# EAGLE board phase and amplifier (EAGLE 9.1.2)
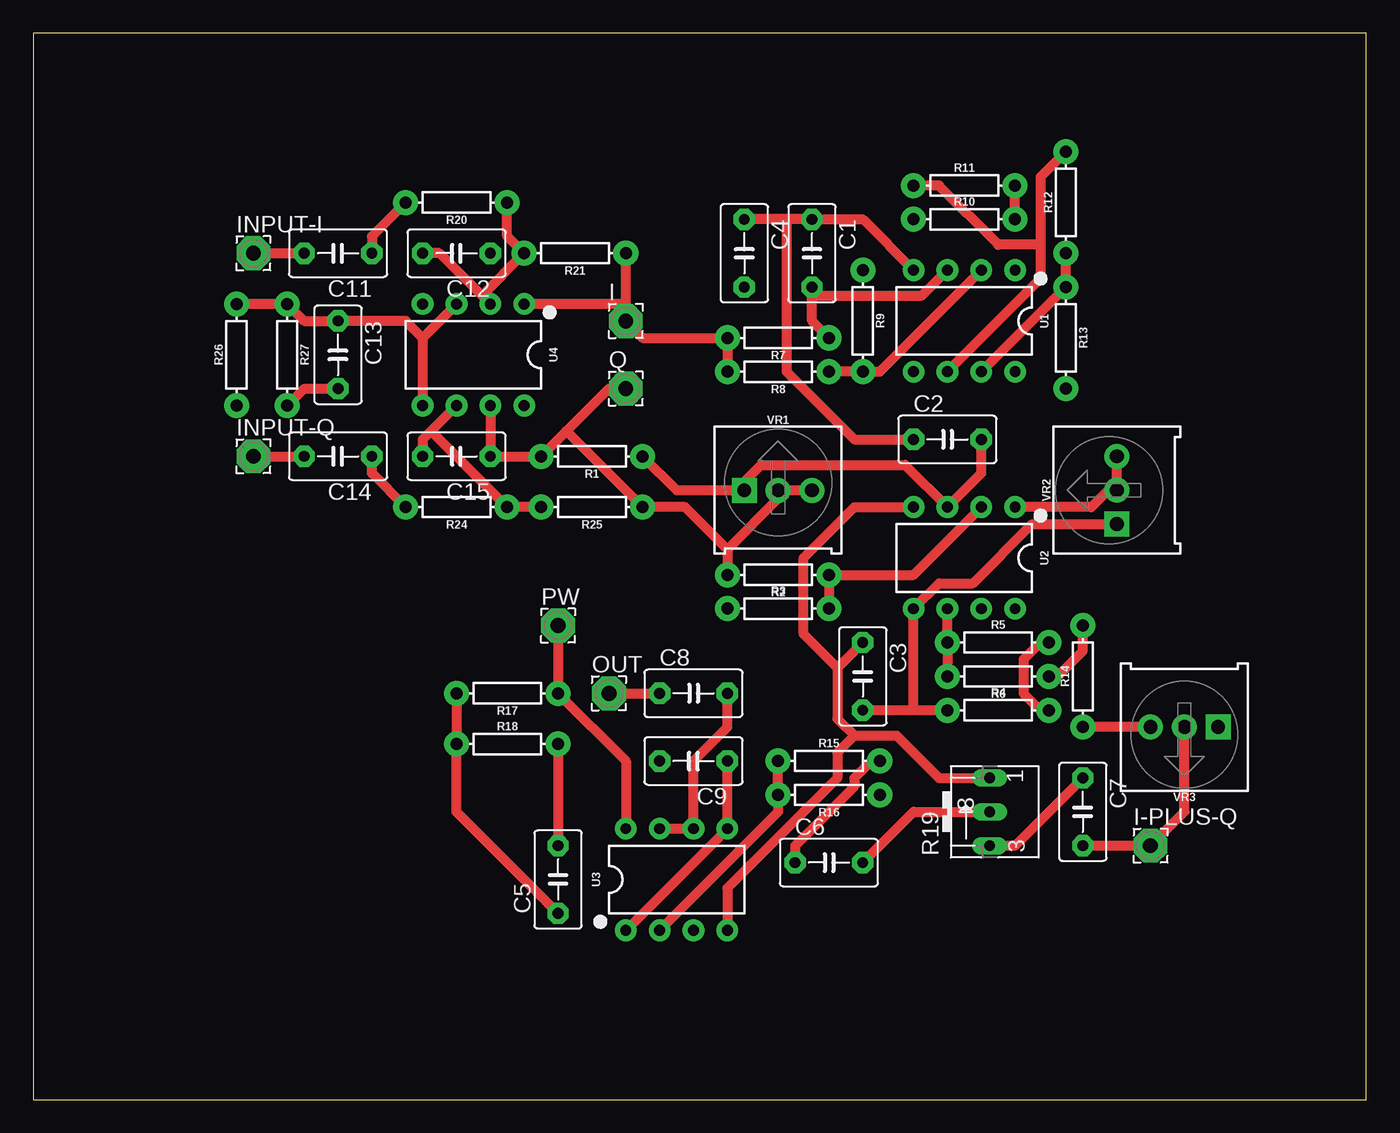
[diagram p0: board, top side]
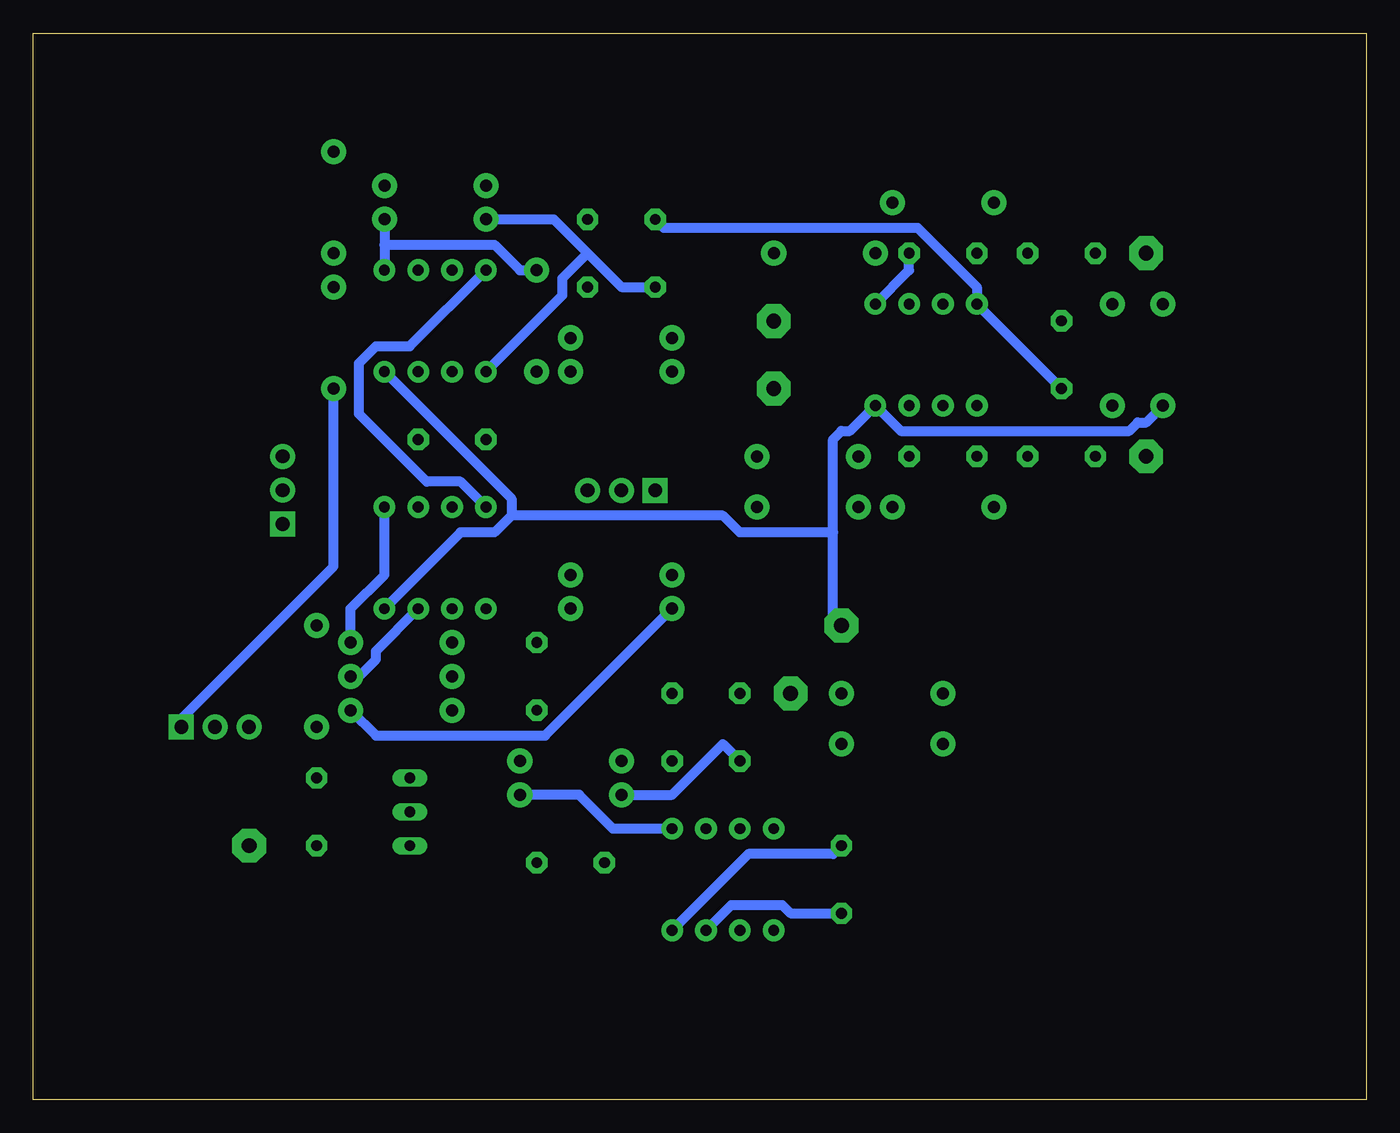
[diagram p1: board, bottom side, seen from below]

Size 100 x 80 mm. Coordinates in mm from the lower left corner, seen from the top.
Outline: 0,0 100,0 100,80 0,80 0,0
Copper layers (1*16): Top 0.035mm / dielectric 1.5mm / Bottom 0.035mm
Design rules "default": minimum track width 6mil, minimum drill 0.35mm, track to track 6mil, track to pad 6mil, pad to pad 6mil, via to via 6mil, smd to smd 6mil, copper to edge 40mil, drill to drill 6mil, minimum pad ring 10mil, minimum via ring 8mil, stop-mask expansion 4mil, vias tented up to drill 0mil, thermal gap 10mil
Net classes: 0 default: width 0.762 mm, drill 0.762 mm, clearance 0.508 mm

## Footprints (pad centres in the part's own frame; a part is rotated, then mirrored left to right if it is on the bottom)
C5B3.5 = drill 0.813 pad 1.6 octagon: 1 -2.54,0; 2 2.54,0
2,54/1,1 = drill 1.118 pad 2.54 octagon: 1 0,0
AXIAL-0.3 = drill 0.9 pad 1.88: P$1 -3.81,0; P$2 3.81,0
B25V = drill 0.813 long: A 2.54,0.635; E -2.54,0.635; S 0,0.635
DIP08 = drill 0.813 pad 1.626: 1 -3.81,-3.81; 2 -1.27,-3.81; 3 1.27,-3.81; 4 3.81,-3.81; 5 3.81,3.81; 6 1.27,3.81; 7 -1.27,3.81; 8 -3.81,3.81
TRIMPOT-PTH-3386U = drill 1.016 pad 1.88 square: 1 -2.54,-0.015 | drill 1.016 pad 1.88: 2 0,-0.015; 3 2.54,-0.015

## Placement (x,y rotation side)
C1  47nF  [C5B3.5]  58.42,63.5 270 top
C2  10nF  [C5B3.5]  68.58,49.53 0 top
C3  .1uF  [C5B3.5]  62.23,31.75 270 top
C4  470nF  [C5B3.5]  53.34,63.5 270 top
C5  10uF  [C5B3.5]  39.37,16.51 90 top
C6  1uF  [C5B3.5]  59.69,17.78 0 top
C7  1uF  [C5B3.5]  78.74,21.59 270 top
C8  10uF  [C5B3.5]  49.53,30.48 0 top
C9  1nF  [C5B3.5]  49.53,25.4 180 top
C11  1uF  [C5B3.5]  22.86,63.5 180 top
C12  1nF  [C5B3.5]  31.75,63.5 180 top
C13  10uF  [C5B3.5]  22.86,55.88 270 top
C14  1uF  [C5B3.5]  22.86,48.26 180 top
C15  1nF  [C5B3.5]  31.75,48.26 180 top
I  [2,54/1,1]  44.45,58.42 0 top
I-PLUS-Q  [2,54/1,1]  83.82,19.05 0 top
INPUT-I  [2,54/1,1]  16.51,63.5 0 top
INPUT-Q  [2,54/1,1]  16.51,48.26 0 top
OUT  [2,54/1,1]  43.18,30.48 0 top
PW  [2,54/1,1]  39.37,35.56 0 top
Q  [2,54/1,1]  44.45,53.34 0 top
R1  10k  [AXIAL-0.3]  41.91,48.26 180 top
R2  3.3k  [AXIAL-0.3]  55.88,39.37 180 top
R3  3.3k  [AXIAL-0.3]  55.88,36.83 0 top
R4  7.5k  [AXIAL-0.3]  72.39,29.21 0 top
R5  3.3k  [AXIAL-0.3]  72.39,34.29 0 top
R6  3.3k  [AXIAL-0.3]  72.39,31.75 180 top
R7  5.1k  [AXIAL-0.3]  55.88,57.15 180 top
R8  3.3k  [AXIAL-0.3]  55.88,54.61 180 top
R9  3.3k  [AXIAL-0.3]  62.23,58.42 270 top
R10  4.3k  [AXIAL-0.3]  69.85,66.04 0 top
R11  3.3k  [AXIAL-0.3]  69.85,68.58 0 top
R12  3.3k  [AXIAL-0.3]  77.47,67.31 90 top
R13  1k  [AXIAL-0.3]  77.47,57.15 270 top
R14  1k  [AXIAL-0.3]  78.74,31.75 90 top
R15  1k  [AXIAL-0.3]  59.69,25.4 0 top
R16  120k  [AXIAL-0.3]  59.69,22.86 180 top
R17  10k  [AXIAL-0.3]  35.56,30.48 180 top
R18  10k  [AXIAL-0.3]  35.56,26.67 0 top
R19  5k  [B25V]  72.39,21.59 90 top
R20  1k  [AXIAL-0.3]  31.75,67.31 180 top
R21  100k  [AXIAL-0.3]  40.64,63.5 180 top
R24  1k  [AXIAL-0.3]  31.75,44.45 180 top
R25  100k  [AXIAL-0.3]  41.91,44.45 180 top
R26  10k  [AXIAL-0.3]  15.24,55.88 90 top
R27  10k  [AXIAL-0.3]  19.05,55.88 270 top
U1  LM358  [DIP08]  69.85,58.42 180 top
U2  LM358  [DIP08]  69.85,40.64 180 top
U3  LM358  [DIP08]  48.26,16.51 0 top
U4  LM358  [DIP08]  33.02,55.88 180 top
VR1  50k  [TRIMPOT-PTH-3386U]  55.88,45.72 0 top
VR2  50k  [TRIMPOT-PTH-3386U]  81.28,45.72 90 top
VR3  500  [TRIMPOT-PTH-3386U]  86.36,27.94 180 top

## Library data of the parts
C1-C9 C11-C15 = capacitor-wima
I I-PLUS-Q INPUT-I INPUT-Q OUT PW Q = wirepad
R1-R18 R20 R21 R24-R27 = SparkFun-Resistors; PROD_ID: RES-12182
R19 = pot
U1-U4 = SparkFun-IC-Amplifiers; PROD_ID: IC-09172
VR1-VR3 = SparkFun-Resistors; PROD_ID: RES-09730; SF_SKU: COM-09806

## Nets
GND: C1.1 C2.1 C3.1 C4.1 C5.2 C13.2 R18.P$2 R19.A R27.P$2 U1.4 U2.4 U3.4 U4.4
N$1: C2.2 R1.P$1 U2.3 VR1.1
N$2: R2.P$1 R3.P$2 U2.2
N$3: R3.P$1 R4.P$2 R5.P$2 U2.1 VR2.2 VR2.3
N$4: C13.1 R26.P$2 R27.P$1 U4.3 U4.5
N$5: C3.2 R4.P$1 U2.5 VR2.1
N$6: R5.P$1 R6.P$2 U2.6
N$7: R8.P$1 R9.P$2 U1.2
N$8: R6.P$1 R14.P$2 U2.7
N$9: C1.2 R7.P$1 U1.3
N$10: C14.2 INPUT-Q.1
N$11: C4.2 R10.P$1 U1.5
N$12: R9.P$1 R10.P$2 R11.P$2 U1.1
N$13: R11.P$1 R12.P$2 U1.6
N$14: R13.P$2 VR3.1
N$15: R12.P$1 R13.P$1 U1.7
N$16: R14.P$1 VR3.3
N$17: C7.2 I-PLUS-Q.1 VR3.2
N$18: C9.1 R16.P$1 U3.1 U3.5
N$19: C9.2 R15.P$1 R16.P$2 U3.2
N$20: C5.1 R17.P$2 R18.P$1 U3.3
N$21: C6.1 R15.P$2
N$22: C6.2 R19.S
N$23: C7.1 R19.E
N$24: C12.1 I.1 R7.P$2 R8.P$2 R21.P$1 U4.1
N$25: C8.2 U3.6 U3.7
N$26: C8.1 OUT.1
N$27: C12.2 R20.P$1 R21.P$2 U4.2
N$28: C11.2 INPUT-I.1
N$29: C11.1 R20.P$2
N$30: C15.1 Q.1 R1.P$2 R2.P$2 R25.P$1 U4.7 VR1.2 VR1.3
N$31: C15.2 R24.P$1 R25.P$2 U4.6
N$33: C14.1 R24.P$2
VCC: PW.1 R17.P$1 R26.P$1 U1.8 U2.8 U3.8 U4.8

## Tracks (layer width: path | path; a pad name or v marks a point on that pad's centre or on a via)
GND
  Top 0.762: C13.2 20.32,53.34 R27.P$2 | 56.52,66.04 C1.1 62.23,66.04 U1.4 | 56.52,66.04 C4.1 | C2.1 61.59,49.53 56.52,54.61 56.52,66.04 | R18.P$2 C5.2 | R19.A 67.94,24.13 64.77,27.3 61.59,27.3 | 61.59,27.3 60.33,28.57 60.33,32.38 | C3.1 60.33,32.38 | U2.4 61.59,44.45 57.78,40.64 57.78,34.92 60.33,32.38 | U3.4 52.07,15.88 60.33,24.13 60.33,26.04 61.59,27.3
  Bottom 0.762: C13.2 U4.4 29.21,60.96 33.66,65.41 52.7,65.41 C4.1 | U3.4 46.35,18.41 40.01,18.41 C5.2 | U1.4 71.75,56.52 74.3,56.52 75.56,55.24 75.56,51.44 70.48,46.35 67.94,46.35 U2.4
N$1
  Top 0.762: C2.2 71.12,46.99 U2.3 65.41,47.62 54.61,47.62 52.7,45.72 | 52.7,45.72 48.26,45.72 R1.P$1 | 52.7,45.72 53.34,45.72 VR1.1 52.7,45.72
N$2
  Top 0.762: U2.2 66.04,39.37 R2.P$1 R3.P$2
N$3
  Top 0.762: U2.1 79.38,44.45 80.64,45.72 81.28,45.72 | 81.28,45.72 VR2.2 81.28,45.72 | 81.28,45.72 81.28,48.26 VR2.3 | R4.P$2 75.56,29.21 74.3,30.48 74.3,33.02 75.56,34.29 R5.P$2
  Bottom 0.762: R3.P$1 61.59,27.3 74.3,27.3 R4.P$2 | U2.1 73.66,39.37 76.2,36.83 R5.P$2
N$4
  Top 0.762: R26.P$2 R27.P$1 20.32,58.42 C13.1 27.94,58.42 29.21,57.15 | 29.21,57.15 U4.5 | U4.3 29.21,57.15
N$5
  Top 0.762: R4.P$1 66.04,29.21 | 66.04,29.21 C3.2 | 66.04,29.21 U2.5 67.94,38.73 70.48,38.73 74.93,43.18 81.28,43.18 VR2.1
N$6
  Top 0.762: U2.6 R5.P$1 R6.P$2
N$7
  Top 0.762: U1.2 63.5,54.61 R9.P$2 R8.P$1
N$8
  Top 0.762: R14.P$2 78.74,33.66 76.83,31.75 R6.P$1
  Bottom 0.762: U2.7 74.3,33.66 74.3,33.02 75.56,31.75 R6.P$1
N$9
  Top 0.762: 58.42,60.33 58.42,58.42 R7.P$1 | 58.42,60.33 C1.2 58.42,60.33 | U1.3 66.67,60.33 58.42,60.33
N$10
  Top 0.762: INPUT-Q.1 C14.2
N$11
  Bottom 0.762: C4.2 55.88,60.96 58.42,63.5 | 58.42,63.5 60.96,66.04 R10.P$1 | U1.5 60.33,60.33 60.33,61.59 58.42,63.5
N$12
  Top 0.762: R10.P$2 R11.P$2
  Bottom 0.762: R10.P$2 73.66,64.14 | 73.66,64.14 U1.1 | R9.P$1 63.5,62.23 65.41,64.14 73.66,64.14
N$13
  Top 0.762: U1.6 75.56,61.59 75.56,64.14 | 75.56,64.14 75.56,69.22 R12.P$2 | R11.P$1 67.94,68.58 72.39,64.14 75.56,64.14
N$14
  Bottom 0.762: R13.P$2 77.47,40.01 88.9,28.57 VR3.1
N$15
  Top 0.762: U1.7 R13.P$1 R12.P$1
N$16
  Top 0.762: R14.P$1 83.82,27.94 VR3.3
N$17
  Top 0.762: C7.2 I-PLUS-Q.1 86.36,21.59 86.36,27.94 VR3.2
N$18
  Top 0.762: C9.1 U3.5 U3.1
  Bottom 0.762: R16.P$1 59.05,22.86 56.52,20.32 U3.5
N$19
  Top 0.762: U3.2 55.88,21.59 R16.P$2 R15.P$1
  Bottom 0.762: C9.2 48.26,26.67 52.07,22.86 R16.P$2
N$20
  Top 0.762: R17.P$2 R18.P$1 31.75,21.59 C5.1
  Bottom 0.762: C5.1 43.18,13.97 43.81,14.61 47.62,14.61 U3.3
N$21
  Top 0.762: C6.1 57.15,19.05 61.59,23.5 61.59,24.13 62.87,25.4 R15.P$2
N$22
  Top 0.762: R19.S 66.04,21.59 C6.2
N$23
  Top 0.762: R19.E 73.66,19.05 C7.1
N$24
  Top 0.762: R8.P$2 R7.P$2 45.72,57.15 I.1 44.45,59.69 | 44.45,59.69 R21.P$1 | 44.45,59.69 U4.1
  Bottom 0.762: C12.1 34.29,62.23 U4.1
N$25
  Top 0.762: C8.2 52.07,27.94 49.53,25.4 U3.6 U3.7
N$26
  Top 0.762: OUT.1 C8.1
N$27
  Top 0.762: C12.2 30.48,63.5 33.66,60.33 | U4.2 33.66,60.33 | 33.66,60.33 R21.P$2 35.56,64.77 R20.P$1
N$28
  Top 0.762: INPUT-I.1 C11.2
N$29
  Top 0.762: C11.1 25.4,64.77 R20.P$2
N$30
  Top 0.762: U4.7 C15.1 R1.P$2 40.01,50.16 | Q.1 43.18,53.34 40.01,50.16 | 52.07,41.27 R2.P$2 | 52.07,41.27 55.88,45.09 VR1.2 55.88,45.72 58.42,45.72 VR1.3 | 52.07,41.27 48.9,44.45 R25.P$1 40.01,50.16
N$31
  Top 0.762: R25.P$2 R24.P$1 29.84,50.16 | C15.2 29.21,49.53 29.84,50.16 | U4.6 29.84,50.16
N$33
  Top 0.762: C14.1 25.4,46.99 R24.P$2
VCC
  Top 0.762: U3.8 44.45,25.4 R17.P$1 PW.1
  Bottom 0.762: U2.8 67.94,42.55 65.41,42.55 64.14,43.81 | 64.14,43.81 64.14,45.09 U1.8 | 40.01,42.55 40.01,36.2 PW.1 | 40.01,42.55 40.01,49.53 39.37,50.16 38.73,50.16 U4.8 34.92,50.16 17.78,50.16 17.14,50.8 16.51,50.8 R26.P$1 | 64.14,43.81 48.26,43.81 46.99,42.55 40.01,42.55